# Altium PCB RelayBoard.PcbDoc
Units mm, origin at the board's own origin, x right, y up, seen from the top; angles counter-clockwise.
Board outline 157.1 x 222 mm, 2 copper layers (Top Layer, Bottom Layer); 85 components, 84 nets, 298 pads, 41 vias.
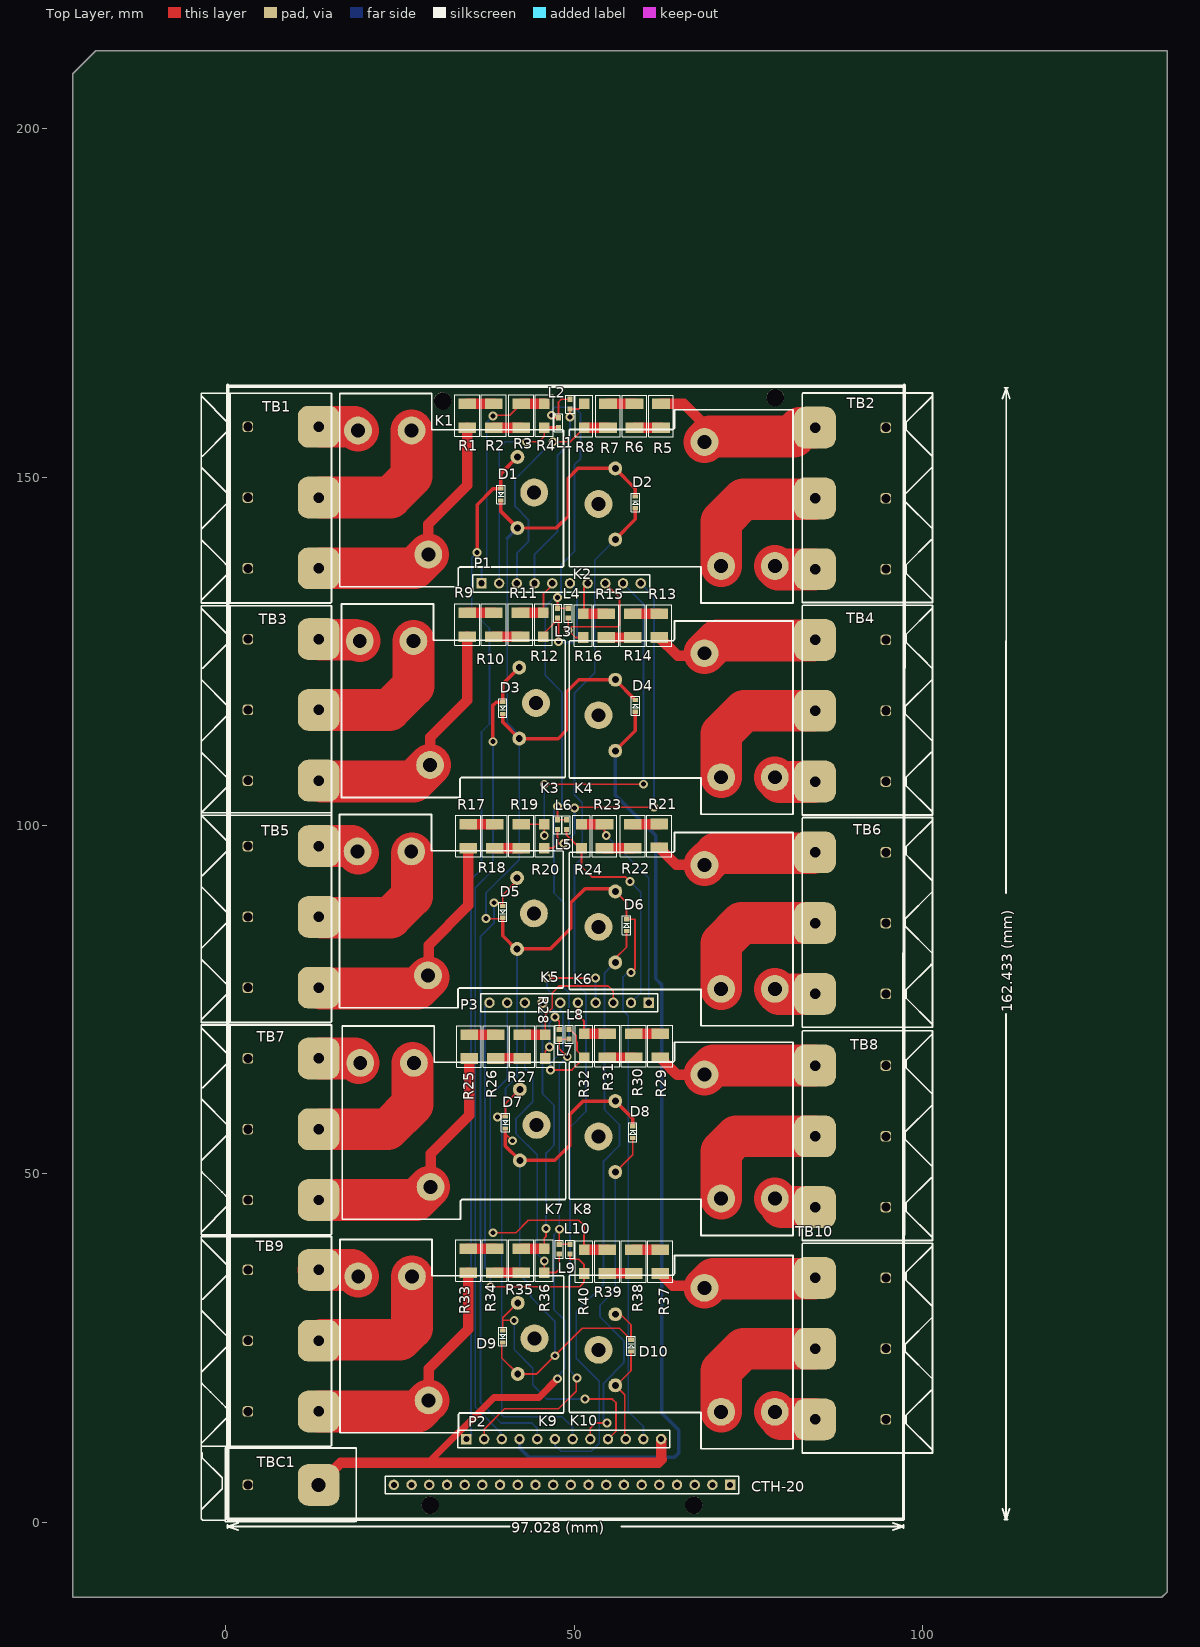
[diagram p0: Top Layer view]
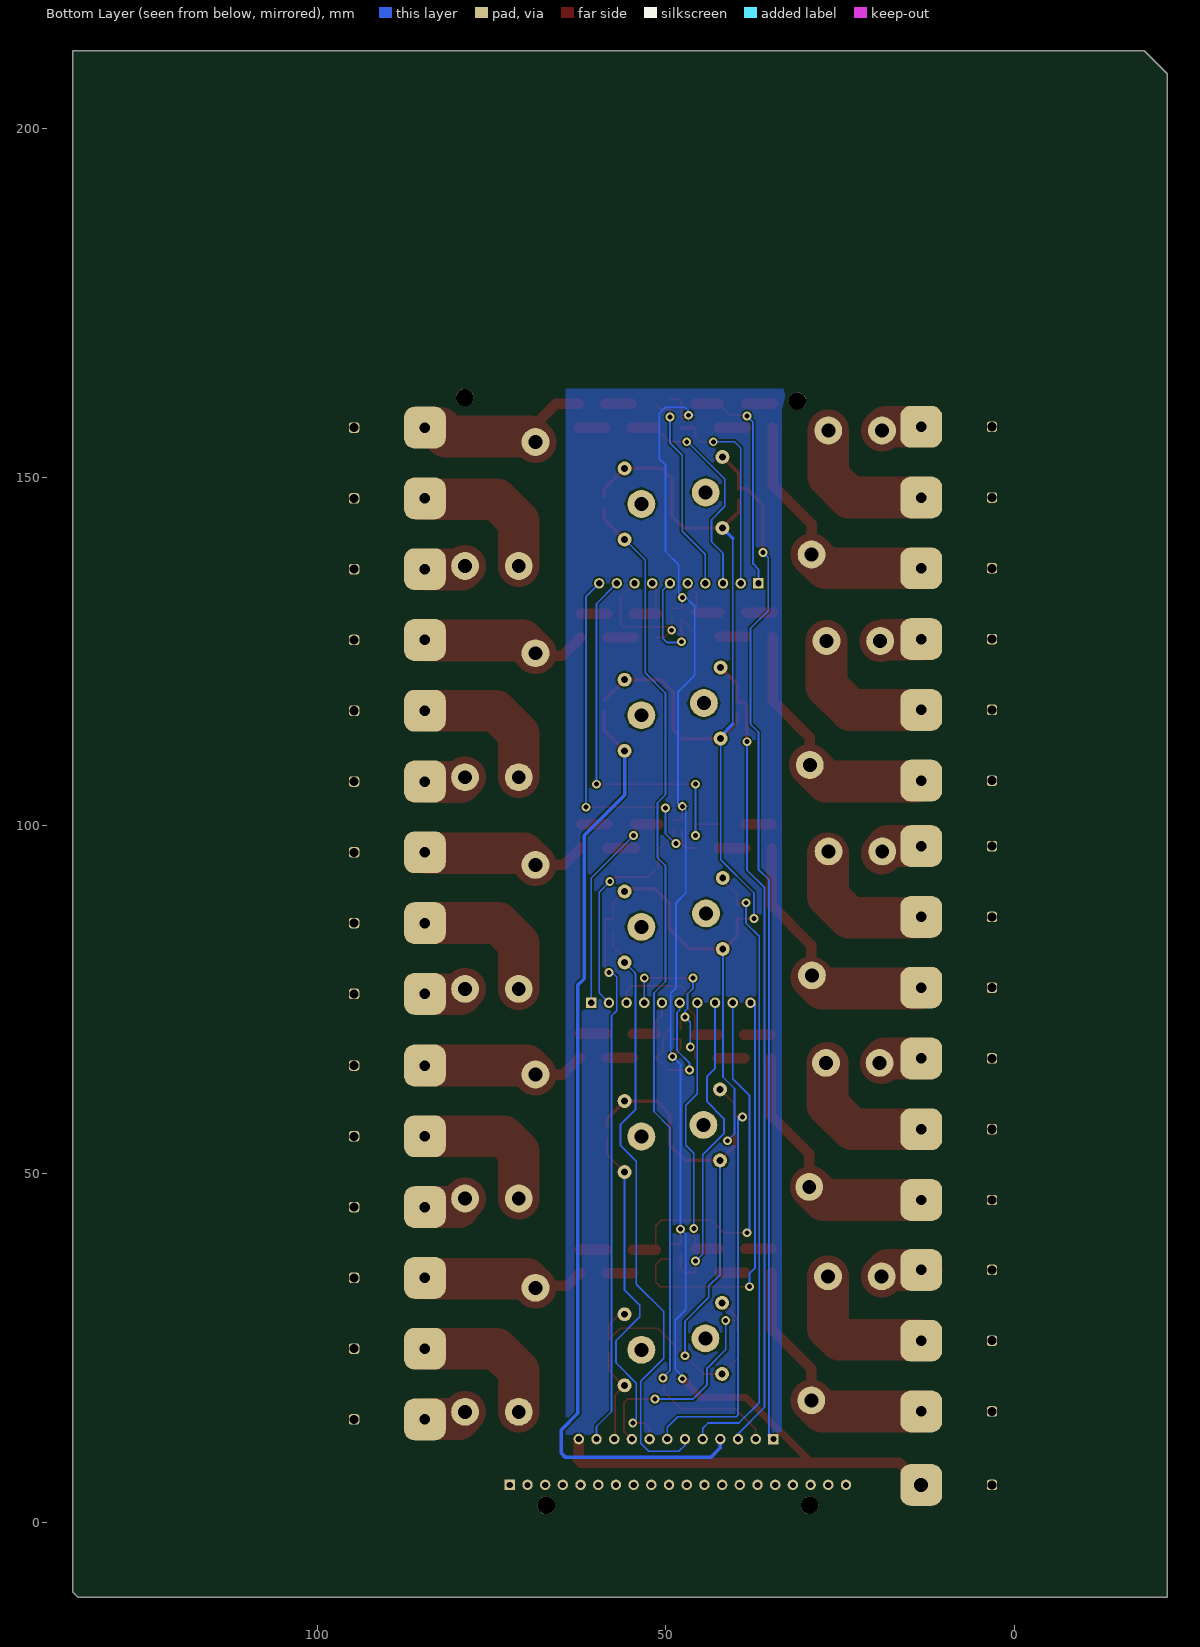
[diagram p1: Bottom Layer view, seen from below]

## Layer stack, top to bottom
Top Layer: signal copper 0.0356
Dielectric: dielectric 0.32, FR-4, Dk 4.8
Bottom Layer: signal copper 0.0356

## Board outline
-21.971,-10.795 -21.971,207.899 -18.669,211.201 135.128,211.201 135.128,-10.033 134.366,-10.795 -21.082,-10.795

## Design rules (kind name [scope] priority, off if disabled: settings)
Clearance [All] p1: gap=0.254
PolygonConnect [All] p1: connectstyle=Relief reliefconductorwidth=0.254 reliefentries=4 polygonreliefangle="90 Angle" airgapwidth=0.254
RoutingVias [All] p1: holewidth=0.711 width=1.27 viastyle="Through Hole" minholewidth=0.559 minwidth=1.118 maxholewidth=0.711 maxwidth=1.27
SolderMaskExpansion [All] p1: expansion=0.102
Width [All] p1: maxlimit=10 minlimit=0.254 preferedwidth=0.254
28 further rules are at their usual default settings.

## Classes and differential pairs
component class RelayBoard: D1 D2 D3 D4 D5 D6 D7 D8 D9 D10 K2 K3 K4 K5 K6 K7 K8 K9 K10 L1 L2 L3 L4 L5 L6 L7 L8 L9 L10 P1 P2 P3 R1 R2 R3 R4 R5 R6 R7 R8 R9 R10 R11 R12 R13 R14 R15 R16 R17 R18 R19 R20 R21 R22 R23 R24 R25 R26 R27 R28 R29 R30 R31 R32 R33 R34 R35 R36 R37 R38 R39 R40

## Components (designator, comment, footprint, x,y, rotation, side; value= is the part's Value field where it differs from the comment)
CTH-20 "Comment" HDR1X20 72.39,5.334 r180 top
D1 "1N4148" SOD523 39.497,146.659 r90 top
D2 "1N4148" SOD523 58.801,147.216 r270 top
D3 "1N4148" SOD523 39.751,116.003 r90 top
D4 "1N4148" SOD523 58.801,118.006 r270 top
D5 "1N4148" SOD523 39.751,86.741 r90 top
D6 "1N4148" SOD523 57.531,86.536 r270 top
D7 "1N4148" SOD523 40.132,56.515 r90 top
D8 "1N4148" SOD523 58.42,56.818 r270 top
D9 "1N4148" SOD523 39.751,25.781 r90 top
D10 "1N4148" SOD523 58.166,26.162 r270 top
K1 "Relay-SPDT" "Relay BT90" 29.07,138.892 r90 top
K2 "Relay-SPDT" "Relay BT90" 68.707,155.041 r270 top
K3 "Relay-SPDT" "Relay BT90" 29.324,108.666 r90 top
K4 "Relay-SPDT" "Relay BT90" 68.707,124.714 r270 top
K5 "Relay-SPDT" "Relay BT90" 29.023,78.466 r90 top
K6 "Relay-SPDT" "Relay BT90" 68.707,94.335 r270 top
K7 "Relay-SPDT" "Relay BT90" 29.404,48.113 r90 top
K8 "Relay-SPDT" "Relay BT90" 68.707,64.236 r270 top
K9 "Relay-SPDT" "Relay BT90" 29.11,17.47 r90 top
K10 "Relay-SPDT" "Relay BT90" 68.707,33.629 r270 top
L1 "FB" 0603C-TBD 47.752,158.496 r270 top
L2 "FB" 0603C-TBD 49.403,161.163 r270 top
L3 "FB" 0603C-TBD 47.625,131.165 r270 top
L4 "FB" 0603C-TBD 49.149,131.165 r270 top
L5 "FB" 0603C-TBD 47.625,100.812 r270 top
L6 "FB" 0603C-TBD 48.895,100.812 r270 top
L7 "FB" 0603C-TBD 47.879,69.316 r90 top
L8 "FB" 0603C-TBD 49.276,69.342 r90 top
L9 "FB" 0603C-TBD 47.879,39.878 r270 top
L10 "FB" 0603C-TBD 49.403,39.878 r270 top
P1 "Header 10" HDR1X10 36.703,134.747 r0 top
P2 "Header 12" HDR1X12 34.544,11.912 r0 top
P3 "Header 10" HDR1X10 60.706,74.549 r180 top
R1 "270K/1%/.250" 1210C-GENERIC 34.671,160.528 r270 top
R2 "270K/1%/.250" 1210C-GENERIC 38.481,157.099 r90 top
R3 "270K/1%/.250" 1210C-GENERIC 42.418,160.528 r270 top
R4 "470" 1206C-GENERIC 45.72,160.528 r270 top
R5 "270K/1%/.250" 1210C-GENERIC 62.484,157.073 r90 top
R6 "270K/1%/.250" 1210C-GENERIC 58.674,160.502 r270 top
R7 "270K/1%/.250" 1210C-GENERIC 54.864,157.073 r90 top
R8 "470" 1206C-GENERIC 51.435,157.073 r90 top
R9 "270K/1%/.250" 1210C-GENERIC 34.671,130.53 r270 top
R10 "270K/1%/.250" 1210C-GENERIC 38.481,127.101 r90 top
R11 "270K/1%/.250" 1210C-GENERIC 42.291,130.53 r270 top
R12 "470" 1206C-GENERIC 45.593,130.53 r270 top
R13 "270K/1%/.250" 1210C-GENERIC 62.23,130.403 r270 top
R14 "270K/1%/.250" 1210C-GENERIC 58.42,126.974 r90 top
R15 "270K/1%/.250" 1210C-GENERIC 54.61,130.403 r270 top
R16 "470" 1206C-GENERIC 51.308,130.403 r270 top
R17 "270K/1%/.250" 1210C-GENERIC 34.798,100.177 r270 top
R18 "270K/1%/.250" 1210C-GENERIC 38.608,96.748 r90 top
R19 "270K/1%/.250" 1210C-GENERIC 42.418,100.177 r270 top
R20 "470" 1206C-GENERIC 45.72,100.177 r270 top
R21 "270K/1%/.250" 1210C-GENERIC 62.23,100.203 r270 top
R22 "270K/1%/.250" 1210C-GENERIC 58.42,96.748 r90 top
R23 "270K/1%/.250" 1210C-GENERIC 54.356,100.177 r270 top
R24 "470" 1206C-GENERIC 51.054,100.177 r270 top
R25 "270K/1%/.250" 1210C-GENERIC 34.925,69.977 r270 top
R26 "270K/1%/.250" 1210C-GENERIC 38.735,66.548 r90 top
R27 "270K/1%/.250" 1210C-GENERIC 42.545,69.977 r270 top
R28 "470" 1206C-GENERIC 45.847,69.977 r270 top
R29 "270K/1%/.250" 1210C-GENERIC 62.357,70.078 r270 top
R30 "270K/1%/.250" 1210C-GENERIC 58.547,66.649 r90 top
R31 "270K/1%/.250" 1210C-GENERIC 54.737,70.078 r270 top
R32 "470" 1206C-GENERIC 51.435,70.078 r270 top
R33 "270K/1%/.250" 1210C-GENERIC 34.798,39.243 r270 top
R34 "270K/1%/.250" 1210C-GENERIC 38.608,35.814 r90 top
R35 "270K/1%/.250" 1210C-GENERIC 42.418,39.243 r270 top
R36 "470" 1206C-GENERIC 45.72,39.243 r270 top
R37 "270K/1%/.250" 1210C-GENERIC 62.357,39.116 r270 top
R38 "270K/1%/.250" 1210C-GENERIC 58.547,35.687 r90 top
R39 "270K/1%/.250" 1210C-GENERIC 54.737,39.116 r270 top
R40 "470" 1206C-GENERIC 51.435,39.116 r270 top
TB1 "Comment" DG135-1 3.175,157.226 r270 top
TB2 "Comment" DG135-1 94.742,136.779 r90 top
TB3 "Comment" DG135-1 3.175,126.746 r270 top
TB4 "Comment" DG135-1 94.742,106.299 r90 top
TB5 "Comment" DG135-1 3.175,97.028 r270 top
TB6 "Comment" DG135-1 94.742,75.819 r90 top
TB7 "Comment" DG135-1 3.175,66.548 r270 top
TB8 "Comment" DG135-1 94.742,45.212 r90 top
TB9 "Comment" DG135-1 3.175,36.195 r270 top
TB10 "Comment" DG135-1 94.742,14.732 r90 top
TBC1 "Comment" DG135-0 13.335,5.334 r180 top

## Footprints (in the part's own frame and the unit in brackets; to place one, negate y for a bottom-side part, rotate by r counter-clockwise, add the part's x,y. Pads: shape width x height; smd on the part's side, far side on the other; paste and mask are expansions set on the pad)
0603C-TBD [mil] "CAPACITOR 0603 TBD"
  rect 30x30 smd: 1(0,0) 2(55,0)
  silkscreen extent -23,-23 78,23, body extent -4,-15 59,15, height 19
1206C-GENERIC [mil]
  rect 60x60 smd: 1(0,0) 2(135,0)
  silkscreen extent -50,-50 185,50, body extent -8,-29 147,29, height 46
1210C-GENERIC [mil]
  rect 60x100 smd: 1(0,0) 2(135,0)
  silkscreen extent -50,-70 185,70, body extent -10,-50 145,50, height 46
DG135-0 [mm]
  rrect50% 6x6 hole 2: 1(0,0)
  rrect50% 1.5x1.5 hole 1.3: 2(10.16,0)
  silkscreen extent -5.4,-5.3 13.4,5.3
DG135-1 [mm]
  rrect50% 6x6 hole 1.5: 1(0,10.16) 2(10.16,10.16) 3(20.32,10.16)
  rrect50% 1.5x1.5 hole 1.3: 1(0,0) 2(10.16,0) 3(20.32,0)
  silkscreen extent -4.8,-6.7 25.3,12
HDR1X10 [mm] "Connector; Header; 10 Position"
  rect 1.5x1.5 hole 0.9: 1(0,0)
  round 1.5 hole 0.9: 2(2.54,0) 3(5.08,0) 4(7.62,0) 5(10.16,0) 6(12.7,0) 7(15.24,0) 8(17.78,0) 9(20.32,0) 10(22.86,0)
  silkscreen extent -1.27,-1.27 24.13,1.27
HDR1X12 [mm] "Connector; Header; 12 Position"
  rect 1.5x1.5 hole 0.9: 1(0,0)
  round 1.5 hole 0.9: 2(2.54,0) 3(5.08,0) 4(7.62,0) 5(10.16,0) 6(12.7,0) 7(15.24,0) 8(17.78,0) 9(20.32,0) 10(22.86,0) 11(25.4,0) 12(27.94,0)
  silkscreen extent -1.27,-1.27 29.21,1.27
HDR1X20 [mm] "Connector; Header; 20 Position"
  rect 1.5x1.5 hole 0.9: 1(0,0)
  round 1.5 hole 0.9: 2(2.54,0) 3(5.08,0) 4(7.62,0) 5(10.16,0) 6(12.7,0) 7(15.24,0) 8(17.78,0) 9(20.32,0) 10(22.86,0) 11(25.4,0) 12(27.94,0) 13(30.48,0) 14(33.02,0) 15(35.56,0) 16(38.1,0) 17(40.64,0) 18(43.18,0) 19(45.72,0) 20(48.26,0)
  silkscreen extent -1.27,-1.27 49.53,1.27
"Relay BT90" [mm] "DIP; 5 Round Pins; Row Space 15.24 mm; Pitch 2.54 mm"
  round 2 hole 1: 1(3.8,-12.8) 2(14,-12.8)
  round 4 hole 2: 3(17.8,10.1) 4(0,0) 5(17.8,2.4) 6(8.9,-15.2)
  silkscreen extent -4.64,-19.4 23.1,12.7
SOD523 [mm]
  rect 0.6x0.8 smd: A(1.7,0) K(0,0)
  silkscreen extent -0.5,-0.6 2.2,0.6, body extent -0.05,-0.53 1.75,0.55, height 0.53

## Part data
D1 D2 D3 D4 D5 D6 D7 D8 D9 D10: library part 1N4001, "1N4001"
K1 K2 K3 K4 K5 K6 K7 K8 K9 K10: "Single-Pole Dual-Throw Relay"
L1 L2 L3 L4 L5 L6 L7 L8 L9 L10: library part FerrBeads/ILBB
P1 P3: "Header, 10-Pin"
P2: "Header, 12-Pin"
R1 R2 R3 R4 R5 R6 R7 R8 R9 R10 R11 R12 R13 R14 R15 R16 R17 R18 R19 R20 R21 R22 R23 R24 R25 R26 R27 R28 R29 R30 R31 R32 R33 R34 R35 R36 R37 R38 R39 R40: library part Res3, "Resistor"

## Free pads (board coordinates)
  round 2.5 hole 2.5: 5(29.337,2.413) 5(31.115,160.909) 5(67.183,2.413) 5(78.867,161.417)

## Via types
v1: diameter 1.27, hole 0.711, Top Layer to Bottom Layer, 41 vias

## Nets (pads, with @x,y where several pads share a name; then routed paths per layer and width w, separated by ;. In a path a pad name is that pad's centre, name@x,y a point inside that pad or via, vN(x,y) a via of type N, cw(c..) or ccw(c..) an arc to the next point about the centre after c; other vN are vias at no path point)
GND: L1.1 L2.1 L3.1 L4.1 L5.1 L6.1 L7.1 L8.1 L9.1 L10.1 P2.12 TBC1.1 | length 247.6
  Top Layer w0.254: v1(46.736,158.877) 46.736,158.75 46.99,158.496 L1.1 47.752,160.782 48.133,161.163 L2.1 ; v1(47.625,102.743) L5.1 L6.1 ; v1(47.625,132.715) L3.1 L4.1 ; v1(47.879,42.037) L9.1 L10.1 ; v1(49.022,66.802) 47.879,67.945 L7.1 49.25,69.316 L8.1
  Top Layer w1: 29.337,8.763 38.481,17.907 44.958,17.907 v1(47.625,20.574)
  Top Layer w1.5: TBC1.1 16.51,8.509 62.103,8.509 62.611,9.017 62.484,9.017 P2.12
  Bottom Layer w0.254: v1(46.736,158.877) 46.736,159.512 47.244,160.02 50.038,160.02 50.927,159.131 50.927,152.654 50.038,151.765 50.038,139.319 48.133,137.414 48.133,133.223 v1(47.625,132.715) 47.117,132.715 45.847,131.445 45.847,121.539 48.26,119.126 48.26,102.997 48.006,102.743 v1(47.625,102.743) 47.117,102.235 47.117,90.297 48.514,88.9 48.514,76.708 49.276,75.946 49.276,67.056 v1(49.022,66.802) 47.879,65.659 v1(47.879,42.037) 47.117,41.275 47.117,30.48 48.641,28.956 48.641,21.971 47.625,20.955 v1(47.625,20.574)
GND: 
NetD1_A: D1.A K1.2 P2.1 | length 146.8
  Top Layer w0.5: v1(36.068,139.192) 36.068,146.05 38.377,148.359 D1.A 39.497,150.519 K1.2
  Bottom Layer w0.254: P2.1@35.179,12.547 35.179,92.202 36.703,93.726 36.703,113.411 37.846,114.554 37.846,128.27 35.306,130.81 35.306,138.43 v1(36.068,139.192)
  Bottom Layer w0.5: P2.1 P2.1@35.179,12.547
NetD1_K: D1.K D2.K D3.K D4.K D5.K D6.K D7.K D8.K D9.K D10.K K1.1 K2.1 K3.1 K4.1 K5.1 K6.1 K7.1 K8.1 K9.1 K10.1 P2.11 | length 350.7
  Top Layer w0.254: v1(37.338,86.614) 39.624,86.614 D5.K ; D9.K 39.624,25.654 39.624,23.556 K9.1 44.643,21.27 v1@47.246,23.874 ; D7.K 40.132,55.753 v1(41.148,54.737) ; v1(47.244,23.876) v1@47.246,23.874 ; K10.1 56.658,29.829 58.166,28.321 D10.K 56.515,27.813 51.186,27.813 v1@47.246,23.874 ; K6.1@55.907,90.524 57.531,88.9 D6.K 58.752,86.536 58.752,79.453 v1(58.166,78.867)
  Top Layer w0.5: D1.K 39.497,145.065 K1.1 47.442,142.692 49.149,144.399 49.149,149.86 50.53,151.241 K2.1 58.801,148.347 D2.K ; D5.K 39.751,84.135 K5.1@41.91,81.976 ; D3.K 39.751,114.839 K3.1 47.696,112.466 48.895,113.665 48.895,119.126 50.683,120.914 55.893,120.914 D4.K ; 40.132,55.753 40.132,53.985 K7.1 47.214,51.913 49.403,54.102 49.403,58.547 51.292,60.436 K8.1 58.42,57.923 D8.K ; K5.1 46.579,82.266 49.53,85.217 49.53,88.9 51.562,90.932 55.499,90.932 K6.1@55.907,90.524
  Bottom Layer w0.254: v1(37.338,86.614) 37.338,90.297 42.124,95.083 K3.1 ; 40.386,114.554 40.386,141.208 ; v1(41.148,54.737) 40.132,55.753 40.132,62.23 41.783,63.881 41.783,64.516 41.795,64.528 41.795,82.238 K5.1 ; K7.1 42.204,35.52 43.815,33.909 43.815,32.258 47.244,28.829 v1(47.244,23.876) ; v1(58.166,78.867) 57.658,78.867 57.035,78.244 57.035,73.418 57.785,72.668 57.785,15.875 59.944,13.716 P2.11
  Bottom Layer w0.5: 40.386,114.554 42.124,112.816 K3.1 ; 40.386,141.208 K1.1
NetD2_A: D2.A K2.2 P2.2 | length 150.2
  Top Layer w0.254: P2.2 37.084,13.335 40.005,16.256 47.752,16.256 50.292,18.796 v1@50.292,20.701
  Top Layer w0.5: K2.2 58.801,143.935 D2.A
  Bottom Layer w0.254: v1(50.419,20.701) 49.403,21.717 49.403,56.642 51.689,58.928 51.689,75.946 50.038,77.597 50.038,94.234 51.181,95.377 51.181,103.251 50.038,104.394 50.038,118.999 52.959,121.92 52.959,138.093 K2.2
NetD3_A: D3.A K3.2 P2.3 | length 115.5
  Top Layer w0.5: v1(38.354,112.014) 38.354,117.221 38.836,117.703 D3.A 39.751,120.293 K3.2
  Bottom Layer w0.254: v1(38.354,112.014) 38.354,93.599 35.814,91.059 35.814,16.51 39.624,12.7 P2.3
NetD4_A: D4.A K4.2 P2.4 | length 136.3
  Top Layer w0.5: K4.2 58.801,113.608 D4.A
  Bottom Layer w0.5: P2.4 42.164,10.668 43.561,9.271 64.389,9.271 65.024,9.906 65.024,13.208 62.611,15.621 62.611,77.089 61.722,77.978 61.722,98.552 55.907,104.367 K4.2
NetD5_A: D5.A K5.2 P2.5 | length 89.8
  Top Layer w0.254: v1(38.481,88.9) 39.292,88.9 D5.A 39.751,90.017 K5.2@41.91,92.176
  Bottom Layer w0.254: v1(38.481,88.9) 38.481,85.979 36.576,84.074 36.576,17.145 39.497,14.224 43.942,14.224 44.704,13.462 P2.5
NetD6_A: D6.A K6.2 P2.6 | length 87.7
  Top Layer w0.254: K6.2 55.907,80.926 57.531,82.55 D6.A
  Bottom Layer w0.254: P2.6 47.244,11.049 48.133,10.16 52.451,10.16 53.594,11.303 53.594,20.193 50.292,23.495 50.292,30.226 54.229,34.163 54.229,51.816 56.515,54.102 56.515,57.023 54.356,59.182 54.356,78.74 54.483,78.867 54.483,78.911 K6.2
NetD6_K: 
NetD7_A: D7.A K7.2 P2.7 | length 61.9
  Top Layer w0.254: v1(38.989,58.166) 39.038,58.215 D7.A 40.132,60.041 K7.2
  Bottom Layer w0.254: v1(38.989,58.166) 39.624,58.166 39.624,15.367 39.878,15.113 48.26,15.113 49.784,13.589 P2.7
NetD8_A: D8.A K8.2 P2.8 | length 50
  Top Layer w0.254: P2.8 52.324,13.462 53.086,14.224 v1(54.737,14.224) ; K8.2 58.42,52.749 D8.A
  Bottom Layer w0.254: v1(54.737,14.224) 54.229,14.732 54.229,19.939 57.15,22.86 57.15,26.035 53.721,29.464 53.721,31.115 55.907,33.301 K8.2
NetD9_A: D9.A K9.2 P2.9 | length 35.6
  Top Layer w0.254: D9.A 39.751,28.956 ; v1(41.402,28.956) 39.751,28.956 ; K9.2 39.751,29.311 39.751,28.956 ; v1(51.562,17.653) 55.499,17.653 56.007,17.145 56.007,13.055 P2.9
  Bottom Layer w0.254: v1(41.402,28.956) 41.402,24.765 44.069,22.098 44.069,19.685 46.101,17.653 v1(51.562,17.653)
NetD10_A: D10.A K10.2 P2.10 | length 14.2
  Top Layer w0.254: P2.10 57.277,12.039 57.277,18.259 K10.2 56.078,19.629 58.166,21.717 D10.A
NetK1_3: K1.3 TB1.1@13.335,157.226 | length 5.5
  Top Layer w6: TB1.1@13.716,157.226 18.436,157.226 K1.3
NetK1_4: K1.4 R1.2 TB1.3@13.335,136.906 | length 36.7
  Top Layer w1.5: K1.4 29.07,143.243 34.671,148.844 R1.2
  Top Layer w6: TB1.3@13.716,136.906 27.084,136.906 K1.4
NetK1_5: K1.5 | length 20.8
  Top Layer w6: 13.716,147.066 23.622,147.066 26.67,150.114 K1.5
NetK2_3: K2.3 TB2.1@84.582,136.779 | length 5.8
  Top Layer w6: K2.3 79.295,136.753 TB2.1@84.396,136.753
NetK2_4: K2.4 R5.2 TB2.3@84.582,157.099 | length 26.9
  Top Layer w1.5: R5.2 65.76,160.502 68.655,157.607 68.655,155.093 K2.4
  Top Layer w6: K2.4 69.495,155.829 81.576,155.829 81.365,156.041 82.397,157.073 TB2.3@84.396,157.073
NetK2_5: K2.5 TB2.2@84.582,146.939 | length 21
  Top Layer w6: K2.5 71.107,143.624 74.295,146.812 TB2.2@84.396,146.812
NetK3_3: K3.3 TB3.1@13.335,126.746 | length 5.7
  Top Layer w6: TB3.1@13.521,126.652 18.53,126.652 K3.3
NetK3_4: K3.4 R9.2 TB3.3@13.335,106.426 | length 37.2
  Top Layer w1.5: K3.4 29.324,112.636 30.661,113.973 33.334,116.646 34.671,117.983 R9.2
  Top Layer w6: TB3.3@13.775,106.299 26.957,106.299 K3.4
NetK3_5: K3.5 TB3.2@13.335,116.586 | length 21
  Top Layer w6: TB3.2@13.775,116.586 23.495,116.586 26.924,120.015 K3.5
NetK4_3: K4.3 TB4.1@84.582,106.299 | length 5.7
  Top Layer w6: K4.3 79.481,106.24 TB4.1@84.269,106.24
NetK4_4: K4.4 R13.2 TB4.3@84.582,126.619 | length 25
  Top Layer w1.5: R13.2 64.871,124.333 67.691,124.333 68.707,125.349 K4.4
  Top Layer w6: K4.4 70.553,126.56 TB4.3@84.269,126.56
NetK4_5: K4.5 TB4.2@84.582,116.459 | length 20.8
  Top Layer w6: K4.5 71.107,113.144 74.422,116.459 TB4.2@84.269,116.459
NetK5_3: K5.3 TB5.1@13.335,97.028 | length 5.8
  Top Layer w6: TB5.1@13.648,97.028 18.085,97.028 K5.3@19.01,95.976
NetK5_4: K5.4 R17.2 TB5.3@13.335,76.708 | length 37.1
  Top Layer w1.5: K5.4@29.11,78.176 29.11,82.831 34.798,88.519 R17.2
  Top Layer w6: TB5.3@13.648,76.581 27.515,76.581 K5.4@29.11,78.176
NetK5_5: K5.5 TB5.2@13.335,86.868 | length 20.5
  Top Layer w6: TB5.2@13.762,86.741 TB5.2@16.256,86.741 ; TB5.2@16.141,86.741 21.128,86.741 23.622,86.741 26.71,89.829 K5.5@26.71,95.976
NetK6_3: K6.3 TB6.1@84.582,75.819 | length 6
  Top Layer w6: K6.3 79.455,75.76 TB6.1@84.396,75.76
NetK6_4: K6.4 R21.2 TB6.3@84.582,96.139 | length 23.7
  Top Layer w1.5: R21.2 64.669,94.335 K6.4
  Top Layer w6: K6.4 70.384,96.012 TB6.3@84.269,96.012
NetK6_5: K6.5 TB6.2@84.582,85.979 | length 20.9
  Top Layer w6: K6.5 71.107,83.045 74.041,85.979 TB6.2@84.269,85.979
NetK7_3: K7.3 TB7.1@13.335,66.548 | length 5.9
  Top Layer w6: TB7.1@13.521,66.548 18.563,66.548 K7.3@19.097,65.887
NetK7_4: K7.4 R25.2 TB7.3@13.335,46.228 | length 35.6
  Top Layer w1.5: K7.4 29.404,52.899 34.925,58.42 R25.2
  Top Layer w6: TB7.3@15.113,46.228 27.338,46.228 K7.4@29.197,48.087
NetK7_5: K7.5 TB7.2@13.335,56.388 | length 20.6
  Top Layer w6: TB7.2@13.648,56.388 23.241,56.388 26.797,59.944 K7.5@26.797,65.887
NetK8_3: K8.3 TB8.1@84.582,45.212 | length 5.9
  Top Layer w6: K8.3 K8.3@79.582,45.661 ; K8.3@79.768,45.212 TB8.1@84.582,45.212
NetK8_4: K8.4 R29.2 TB8.3@84.582,65.532 | length 23.6
  Top Layer w1.5: R29.2 64.77,64.236 K8.4
  Top Layer w6: K8.4 70.003,65.532 TB8.3@84.396,65.532
NetK8_5: K8.5 TB8.2@84.582,55.372 | length 21
  Top Layer w6: K8.5 71.107,53.2 73.279,55.372 TB8.2@84.396,55.372
NetK9_3: K9.3 TB9.1@13.335,36.195 | length 6.1
  Top Layer w6: TB9.1@13.267,36.195 18.085,36.195 K9.3
NetK9_4: K9.4 R33.2 TB9.3@13.335,15.875 | length 37
  Top Layer w1.5: K9.4 29.11,21.998 34.798,27.686 R33.2
  Top Layer w6: TB9.3@13.462,15.875 27.515,15.875 K9.4
NetK9_5: K9.5 TB9.2@13.335,26.035 | length 21.1
  Top Layer w6: TB9.2@13.775,26.162 25.019,26.162 26.71,27.853 K9.5
NetK10_3: K10.3 TB10.1@84.582,14.732 | length 6.2
  Top Layer w6: K10.3 79.709,14.8 TB10.1@84.523,14.8
NetK10_4: K10.4 R37.2 TB10.3@84.582,35.052 | length 23.4
  Top Layer w1.5: R37.2 64.135,33.909 68.427,33.909 K10.4
  Top Layer w6: K10.4 70.003,34.925 TB10.3@84.396,34.925
NetK10_5: K10.5 TB10.2@84.582,24.892 | length 20.5
  Top Layer w6: K10.5 71.107,21.704 74.295,24.892 TB10.2@84.396,24.892
NetL1_2: L1.2 P1.2 R4.2 | length 29.9
  Top Layer w0.254: v1(43.18,155.067) 44.958,155.067 45.72,155.829 R4.2 R4.2@45.974,157.099
  Top Layer w0.5: R4.2@45.974,157.099 L1.2
  Bottom Layer w0.254: P1.2 39.243,154.178 40.132,155.067 v1(43.18,155.067)
NetL2_2: L2.2 P1.4 R8.2 | length 29.5
  Top Layer w0.254: v1(49.403,158.623) L2.2 50.699,159.766 R8.2
  Bottom Layer w0.254: P1.4 44.323,138.938 47.625,142.24 47.625,153.162 49.403,154.94 v1(49.403,158.623)
NetL3_2: L3.2 P1.6 R12.2 | length 17.9
  Top Layer w0.254: R12.2@45.593,127.482 47.752,129.641 v1(47.752,126.365)
  Bottom Layer w0.254: v1(47.752,126.365) 47.625,126.238 49.784,126.238 50.419,126.873 50.419,133.731 P1.6
NetL4_2: L4.2 P1.8 R16.2 | length 18.8
  Top Layer w0.254: L4.2 v1(49.149,128.016) ; R16.2 50.191,126.974 v1(49.149,128.016) ; P1.8 56.515,132.715 56.515,128.778 56.261,128.524 49.657,128.524 v1(49.149,128.016)
NetL5_2: L5.2 P1.10 R20.2 | length 55.3
  Top Layer w0.254: R20.2 46.964,96.748 47.625,97.409 ; L5.2 47.625,97.409 ; v1(48.514,97.409) 47.625,97.409 ; v1(50.038,102.489) 50.165,102.616 v1(61.468,102.616)
  Bottom Layer w0.254: v1(48.514,97.409) 48.641,97.409 50.038,98.806 v1(50.038,102.489) ; P1.10 61.468,132.842 v1(61.468,102.616)
NetL6_2: L6.2 P3.2 R24.2 | length 32.8
  Top Layer w0.254: L6.2 48.895,98.679 50.826,96.748 R24.2 51.054,94.107 52.578,92.583 57.404,92.583 v1(58.039,91.948)
  Bottom Layer w0.254: v1(58.039,91.948) 59.563,90.424 59.563,75.946 P3.2
NetL7_2: L7.2 P3.4 R28.2 | length 25.2
  Top Layer w0.254: R28.2 45.847,67.564 v1(46.482,68.199) ; v1(46.101,78.105) v1(53.086,78.105) ; v1(47.244,72.517) 47.879,71.882 L7.2
  Bottom Layer w0.254: v1(46.101,78.105) 46.101,76.581 46.875,75.807 46.875,73.712 47.244,73.343 v1(47.244,72.517) 46.482,71.755 v1(46.482,68.199) ; P3.4 v1(53.086,78.105)
NetL8_2: L8.2 P3.6 R32.2 | length 21.2
  Top Layer w0.254: v1(46.609,64.897) 49.683,64.897 R32.2 50.419,67.665 50.419,68.904 50.292,69.031 50.292,69.85 49.403,70.739 L8.2
  Bottom Layer w0.254: v1(46.609,64.897) 46.609,65.913 48.387,67.691 48.387,73.152 48.006,73.533 P3.6
NetL9_2: L9.2 P3.8 R36.2 | length 46.4
  Top Layer w0.254: v1(45.72,37.465) R36.2 47.371,35.814 47.879,36.322 L9.2
  Bottom Layer w0.254: P3.8 42.926,65.151 44.069,64.008 44.069,60.325 41.656,57.912 41.656,55.753 44.704,52.705 44.704,38.481 v1(45.72,37.465)
NetL10_2: L10.2 P3.10 R40.2 | length 60.3
  Top Layer w0.254: v1(37.973,33.782) 50.8,33.782 51.435,34.417 R40.2 51.435,36.957 50.673,37.719 49.403,37.719 L10.2
  Bottom Layer w0.254: P3.10@37.211,74.422 37.211,36.449 37.973,35.687 v1(37.973,33.782)
NetP1_1: P1.1 R3.1 R4.1 | length 32.8
  Top Layer w0.254: v1(38.354,158.75) 38.481,158.877 40.767,158.877 R3.1
  Top Layer w1.5: R3.1 R4.1
  Bottom Layer w0.254: P1.1 36.703,136.779 37.465,137.541 37.465,157.861 v1(38.354,158.75)
NetP1_3: P1.3 R7.1 R8.1 | length 32.8
  Top Layer w0.254: v1(46.99,155.067) 49.429,155.067 R8.1
  Top Layer w1.5: R8.1 R7.1
  Bottom Layer w0.254: P1.3 41.783,139.065 43.434,140.716 43.434,143.891 41.529,145.796 41.529,149.733 46.736,154.94 46.863,154.94 v1(46.99,155.067)
NetP1_5: P1.5 R11.1 R12.1 | length 8
  Top Layer w0.254: R12.1 45.593,133.223 46.863,134.493 P1.5
  Top Layer w1.5: R11.1 R12.1
NetP1_7: P1.7 R15.1 R16.1 | length 7.9
  Top Layer w0.254: R16.1 51.435,130.53 51.435,134.239 P1.7
  Top Layer w1.5: R16.1 R15.1
NetP1_9: P1.9 R19.1 R20.1 | length 56.6
  Top Layer w0.254: R19.1 R20.1 v1(45.72,98.552) ; v1(45.72,105.918) v1(59.944,105.918)
  Bottom Layer w0.254: v1(45.72,98.552) v1(45.72,105.918) ; P1.9 59.944,131.826 v1(59.944,105.918)
NetP3_1: P3.1 R23.1 R24.1 | length 31.6
  Top Layer w0.254: R23.1 54.356,98.806 v1(54.61,98.552)
  Top Layer w1.5: R24.1 R23.1
  Bottom Layer w0.254: v1(54.61,98.552) 60.706,92.456 P3.1
NetP3_3: P3.3 R27.1 R28.1 | length 20.8
  Top Layer w0.254: R28.1 45.847,72.771 46.863,73.787 46.863,75.946 47.879,76.962 54.864,76.962 55.626,76.2 P3.3
  Top Layer w1.5: R27.1 R28.1
NetP3_5: P3.5 R31.1 R32.1 | length 8.1
  Top Layer w0.254: P3.5 50.546,72.771 51.435,71.882 R32.1
  Top Layer w1.5: R32.1 R31.1
NetP3_7: P3.7 R35.1 R36.1 | length 39.9
  Top Layer w0.254: R36.1 45.72,40.767 45.974,41.021 v1(45.974,42.164)
  Top Layer w1.5: R35.1 R36.1
  Bottom Layer w0.254: P3.7 45.466,61.468 47.117,59.817 47.117,54.102 45.974,52.959 v1(45.974,42.164)
NetP3_9: P3.9 R39.1 R40.1 | length 55.2
  Top Layer w0.254: v1(38.354,41.529) 41.656,41.529 43.434,43.307 50.673,43.307 51.435,42.545 R40.1
  Top Layer w1.5: R40.1 R39.1
  Bottom Layer w0.254: v1(38.354,41.529) 38.227,41.656 37.973,41.656 37.973,61.214 40.386,63.627 P3.9
NetR1_1: R1.1 R2.2 | length 3.8
  Top Layer w1.5: R1.1 R2.2
NetR2_1: R2.1 R3.2 | length 3.9
  Top Layer w1.5: R2.1 R3.2
NetR5_1: R5.1 R6.2 | length 3.8
  Top Layer w1.5: R6.2 R5.1
NetR6_1: R6.1 R7.2 | length 3.8
  Top Layer w1.5: R7.2 R6.1
NetR9_1: R9.1 R10.2 | length 3.8
  Top Layer w1.5: R9.1 R10.2
NetR10_1: R10.1 R11.2 | length 3.8
  Top Layer w1.5: R10.1 R11.2
NetR13_1: R13.1 R14.2 | length 3.8
  Top Layer w1.5: R14.2 R13.1
NetR14_1: R14.1 R15.2 | length 3.8
  Top Layer w1.5: R15.2 R14.1
NetR17_1: R17.1 R18.2 | length 3.8
  Top Layer w1.5: R17.1 R18.2
NetR18_1: R18.1 R19.2 | length 3.8
  Top Layer w1.5: R18.1 R19.2
NetR21_1: R21.1 R22.2 | length 3.8
  Top Layer w1.5: R22.2 58.434,100.191 62.218,100.191 R21.1
NetR22_1: R22.1 R23.2 | length 4.1
  Top Layer w1.5: R23.2 R22.1
NetR25_1: R25.1 R26.2 | length 3.8
  Top Layer w1.5: R25.1 R26.2
NetR26_1: R26.1 R27.2 | length 3.8
  Top Layer w1.5: R26.1 R27.2
NetR29_1: R29.1 R30.2 | length 3.8
  Top Layer w1.5: R30.2 R29.1
NetR30_1: R30.1 R31.2 | length 3.8
  Top Layer w1.5: R31.2 R30.1
NetR33_1: R33.1 R34.2 | length 3.8
  Top Layer w1.5: R33.1 R34.2
NetR34_1: R34.1 R35.2 | length 3.8
  Top Layer w1.5: R34.1 R35.2
NetR37_1: R37.1 R38.2 | length 3.8
  Top Layer w1.5: R38.2 R37.1
NetR38_1: R38.1 R39.2 | length 3.8
  Top Layer w1.5: R39.2 R38.1
pads on no net: CTH-20.1 CTH-20.2 CTH-20.3 CTH-20.4 CTH-20.5 CTH-20.6 CTH-20.7 CTH-20.8 CTH-20.9 CTH-20.10 CTH-20.11 CTH-20.12 CTH-20.13 CTH-20.14 CTH-20.15 CTH-20.16 CTH-20.17 CTH-20.18 CTH-20.19 CTH-20.20 K1.6 K2.6 K3.6 K4.6 K5.6 K6.6 K7.6 K8.6 K9.6 K10.6 TB1.1@3.175,157.226 TB1.2 TB1.3@3.175,136.906 TB2.1@94.742,136.779 TB2.2@94.742,146.939 TB2.3@94.742,157.099 TB3.1@3.175,126.746 TB3.2@3.175,116.586 TB3.3@3.175,106.426 TB4.1@94.742,106.299 TB4.2@94.742,116.459 TB4.3@94.742,126.619 TB5.1@3.175,97.028 TB5.2@3.175,86.868 TB5.3@3.175,76.708 TB6.1@94.742,75.819 TB6.2@94.742,85.979 TB6.3@94.742,96.139 TB7.1@3.175,66.548 TB7.2@3.175,56.388 TB7.3@3.175,46.228 TB8.1@94.742,45.212 TB8.2@94.742,55.372 TB8.3@94.742,65.532 TB9.1@3.175,36.195 TB9.2@3.175,26.035 TB9.3@3.175,15.875 TB10.1@94.742,14.732 TB10.2@94.742,24.892 TB10.3@94.742,35.052 TBC1.2

## Polygon pours and split planes (outlines as drawn)
GND on Bottom Layer "Top Layer-No Net" (solid, remove dead copper): 32.766,161.432 33.12,162.687 64.362,162.687 64.362,12.094 65.659,7.493 64.244,12.513 33.355,12.513 33.355,159.759 32.766,161.85

## Silkscreen, mask and mechanical layers (free items; w line width, h text height)
Top Overlay:
  lines w0.254: -3.525,1.778 -0.508,4.795 -0.508,6.35 -3.429,9.271 -3.429,9.906 ; -3.525,10.895 -3.525,0.477 -3.302,0.254 -0.065,0.254 ; 0.254,-0.889 0.254,-0.381 ; 1.778,-1.143 0.254,-0.635 ; 1.778,-0.127 0.254,-0.635 ; 40.744,-0.635 0.254,-0.635 ; 56.792,-0.635 97.282,-0.635 ; 95.758,-1.143 97.282,-0.635 ; 95.758,-0.127 97.282,-0.635 ; 97.282,-0.889 97.282,-0.381 ; 97.282,163.195 97.409,163.195 ; 111.492,1.905 112,0.381 ; 111.506,161.29 112.014,162.814 ; 111.746,0.381 112.254,0.381 ; 111.76,162.814 112.268,162.814 ; 112.006,72.939 112,0.381 ; 112.008,90.256 112.014,162.814 ; 112.508,1.905 112,0.381 ; 112.522,161.29 112.014,162.814
  lines w0.5: 0.254,163.068 97.282,163.068 ; 0.254,163.195 0.254,0.381 97.282,0.381 97.409,163.195
  text "162.433 (mm)" at 112.92,73.193 h1.52 r90
  text "97.028 (mm)" at 40.998,-1.549 h1.52
Mechanical 1:
  lines w0.254: 16.383,-3.582 16.383,165.455 ; 83.058,-3.582 83.058,167.36